# Altium PCB HDMI_To_MIPI.PcbDoc
Units mm, origin at the board's own origin, x right, y up, seen from the top; angles counter-clockwise.
Board outline 30 x 30 mm, 2 copper layers (Top Layer, Bottom Layer); 2 components, 11 nets, 42 pads, 23 vias.
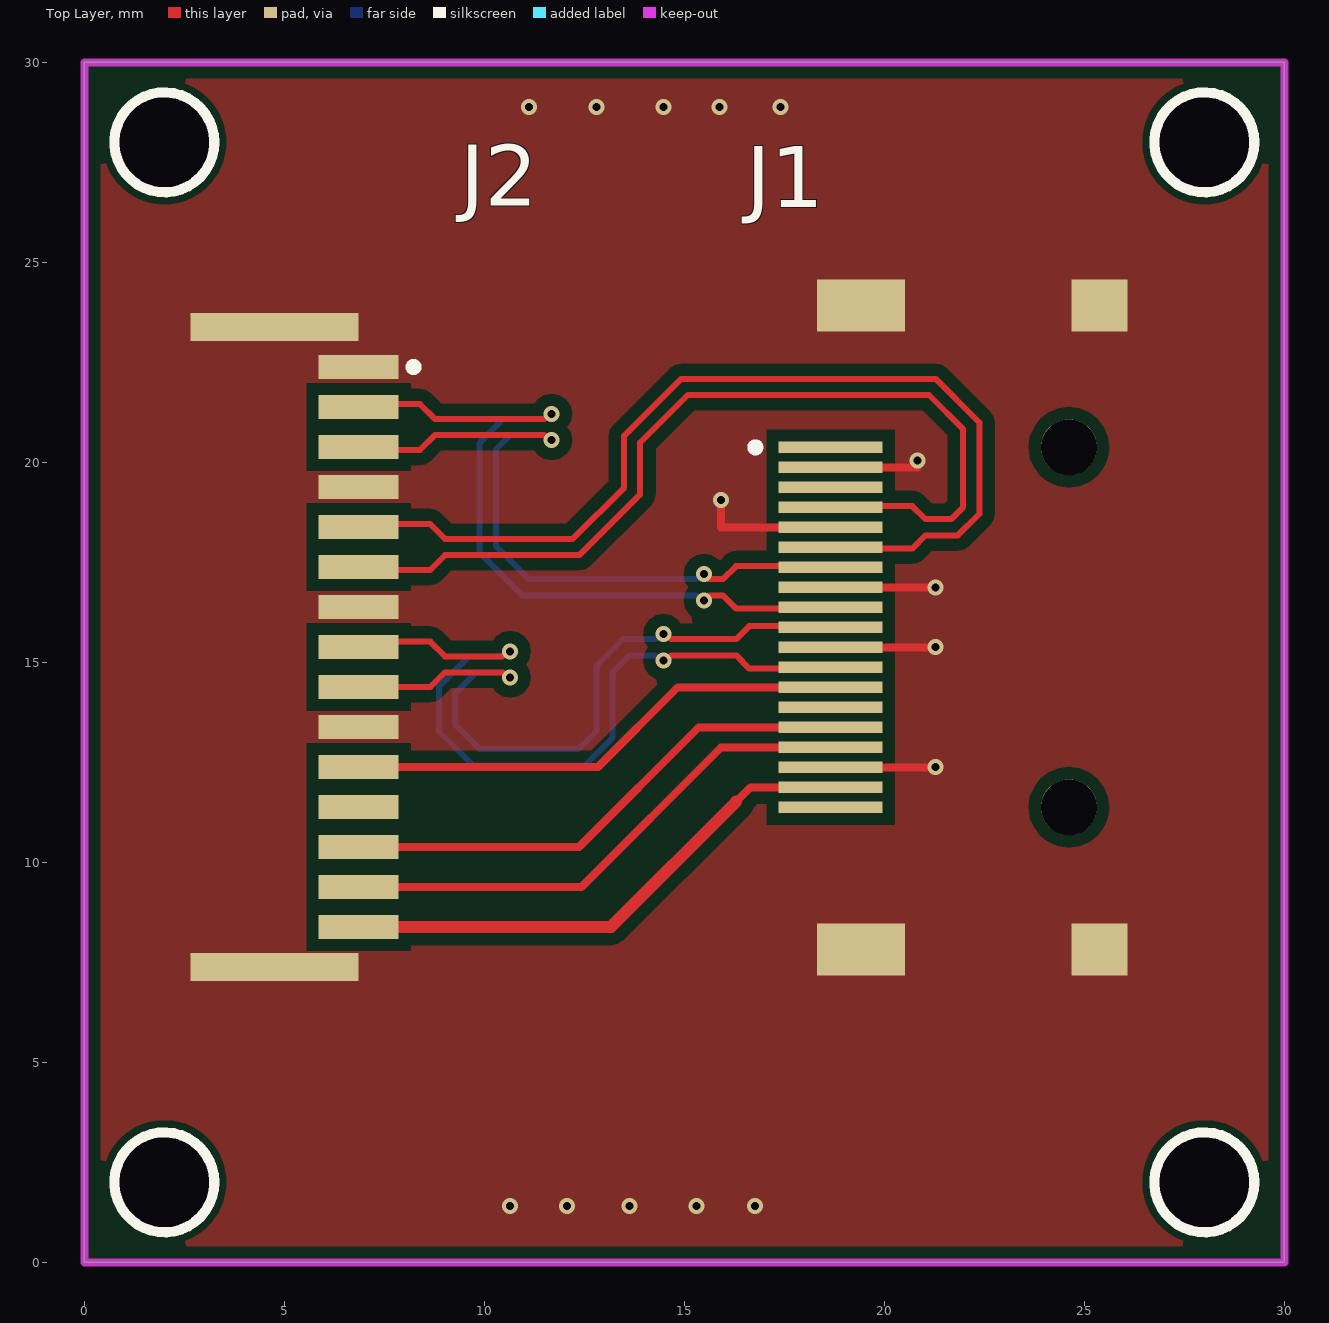
[diagram p0: Top Layer view]
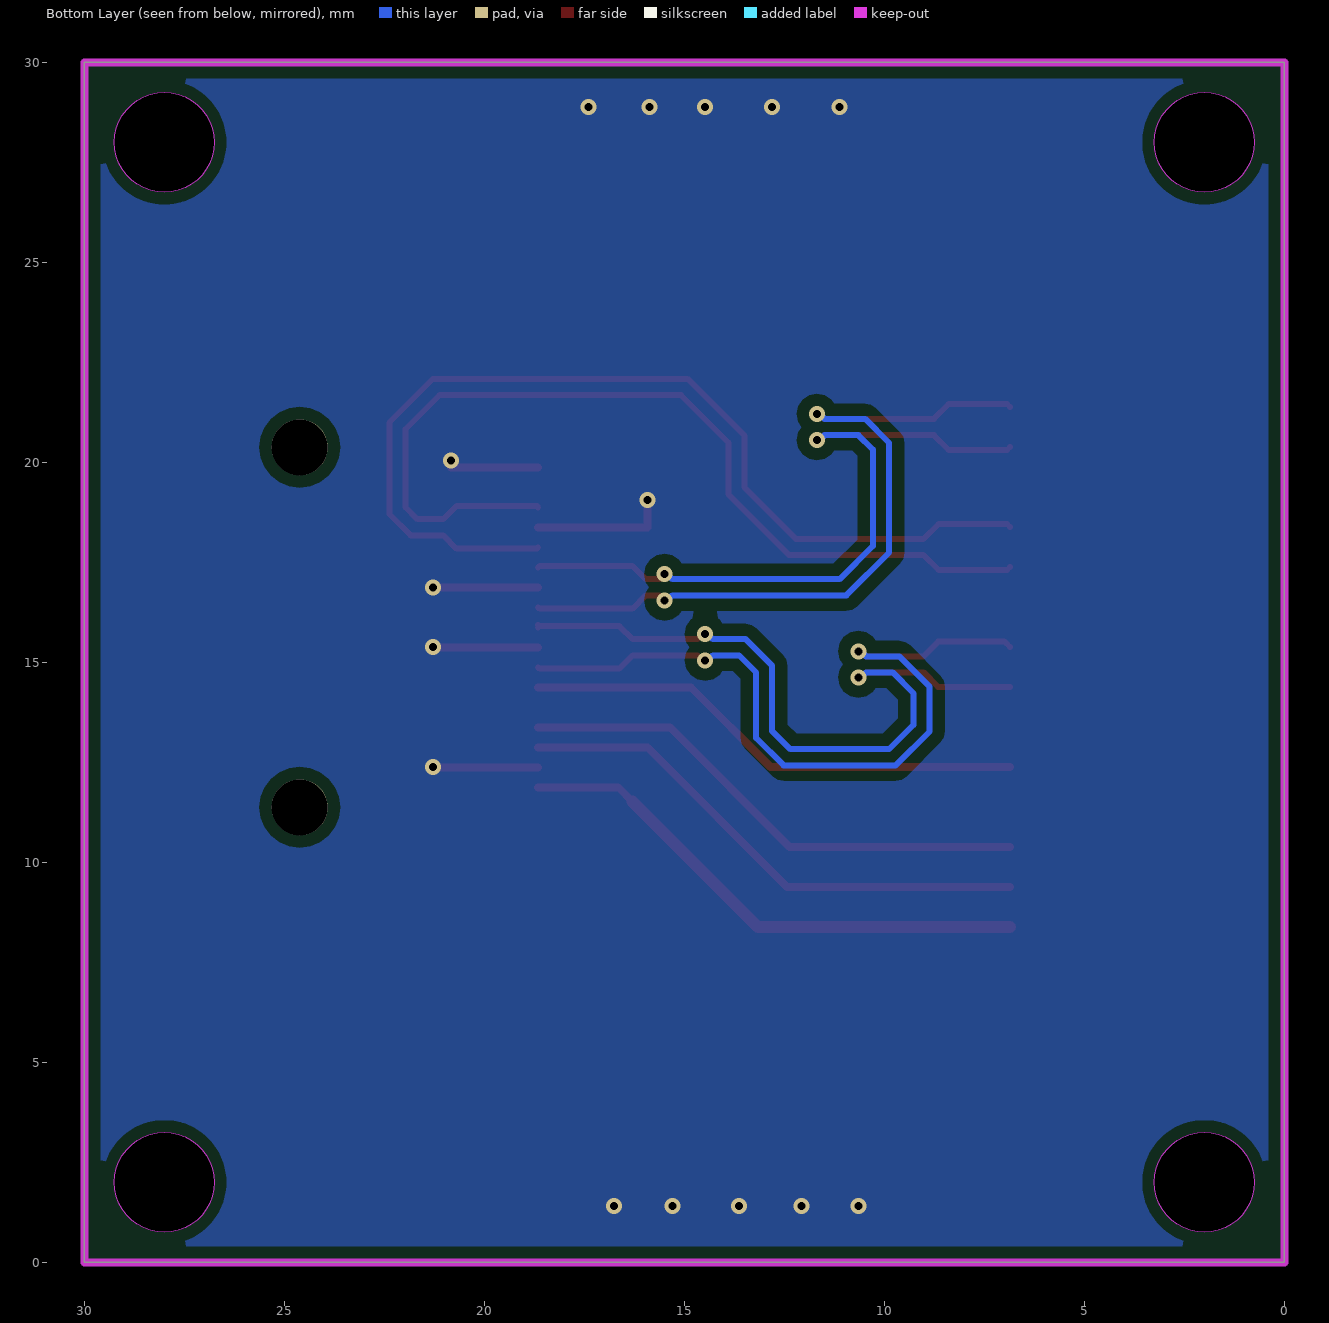
[diagram p1: Bottom Layer view, seen from below]

## Layer stack, top to bottom
Top Solder: solder mask 0.0102, Solder Resist, Dk 3.5
Top Layer: signal copper 0.0356
Dielectric 1: dielectric 0.32, FR-4, Dk 4.8
Bottom Layer: signal copper 0.0356
Bottom Solder: solder mask 0.0102, Solder Resist, Dk 3.5

## Board outline
0,0 30,0 30,30 0,30
cut-out: 26.75,2 ccw(c28,2) 28,0.75 ccw(c28,2) 29.25,2 ccw(c28,2) 28,3.25 ccw(c28,2)
cut-out: 0.75,2 ccw(c2,2) 2,0.75 ccw(c2,2) 3.25,2 ccw(c2,2) 2,3.25 ccw(c2,2)
cut-out: 26.75,28 ccw(c28,28) 28,26.75 ccw(c28,28) 29.25,28 ccw(c28,28) 28,29.25 ccw(c28,28)
cut-out: 0.75,28 ccw(c2,28) 2,26.75 ccw(c2,28) 3.25,28 ccw(c2,28) 2,29.25 ccw(c2,28)

## Design rules (kind name [scope] priority, off if disabled: settings)
Clearance Clearance_1 [InPoly] p1: gap=0.3 ignorepadtopadclearanceinfootprint=FALSE
Clearance [All] p2: gap=0.254 ignorepadtopadclearanceinfootprint=TRUE
DiffPairsRouting [All] p1: maxlimit=5 minlimit=0.254 mostfreqgap=1 toplayer_minwidth=0.15 toplayer_maxwidth=0.381 toplayer_prefwidth=0.381 bottomlayer_minwidth=0.15 bottomlayer_maxwidth=0.381 bottomlayer_prefwidth=0.381 substack1={B5EAA202-C5EF-4AA6-949E-0529C2F063FD} toplayer_{b5eaa202-c5ef-4aa6-949e-0529c2f063fd}_minwidth=0.15 toplayer_{b5eaa202-c5ef-4aa6-949e-0529c2f063fd}_maxwidth=0.381 toplayer_{b5eaa202-c5ef-4aa6-949e-0529c2f063fd}_prefwidth=0.381 bottomlayer_{b5eaa202-c5ef-4aa6-949e-0529c2f063fd}_minwidth=0.15 bottomlayer_{b5eaa202-c5ef-4aa6-949e-0529c2f063fd}_maxwidth=0.381 bottomlayer_{b5eaa202-c5ef-4aa6-949e-0529c2f063fd}_prefwidth=0.381 maxuncoupledlength=12.7
HoleSize [All] p1: absolutevalues=TRUE maxlimit=10 minlimit=0.025 maxpercent=80.000 minpercent=20.000
PolygonConnect [All] p1: connectstyle=Direct reliefconductorwidth=0.254 reliefentries=4 polygonreliefangle="90 Angle" airgapwidth=0.254
RoutingVias [All] p1: holewidth=0.2 width=0.4 viastyle="Through Hole" minholewidth=0.2 minwidth=0.4 maxholewidth=5 maxwidth=1.27
SolderMaskExpansion [All] p1: expansion=0.102
Width [All] p1: maxlimit=3 minlimit=0.15 preferedwidth=0.254 substack1={B5EAA202-C5EF-4AA6-949E-0529C2F063FD}
28 further rules are at their usual default settings.

## Classes and differential pairs
differential pair HDMI_MIPI_D1: +HDMI_MIPI_D1_P -HDMI_MIPI_D1_N
differential pair HDMI_MIPI_D0: +HDMI_MIPI_D0_P -HDMI_MIPI_D0_N
differential pair HDMI_MIPI_CLK: +HDMI_MIPI_CLK_P -HDMI_MIPI_CLK_N

## Components (designator, comment, footprint, x,y, rotation, side; value= is the part's Value field where it differs from the comment)
J1 "HDMI" 2000124100BK 23.876,15.875 r90 top
J2 "SFW 15R-1STE1LF" AMPHENOL_SFW15R-1STE1LF 6.858,15.383 r270 top

## Footprints (in the part's own frame and the unit in brackets; to place one, negate y for a bottom-side part, rotate by r counter-clockwise, add the part's x,y. Pads: shape width x height; smd on the part's side, far side on the other; paste and mask are expansions set on the pad)
2000124100BK [mm]
  rect 0.28x2.6 smd: 1(4.5,5.22) 2(4,5.22) 3(3.5,5.22) 4(3,5.22) 5(2.5,5.22) 6(2,5.22) 7(1.5,5.22) 8(1,5.22) 9(0.5,5.22) 10(0,5.22) 11(-0.5,5.22) 12(-1,5.22) 13(-1.5,5.22) 14(-2,5.22) 15(-2.5,5.22) 16(-3,5.22) 17(-3.5,5.22) 18(-4,5.22) 19(-4.5,5.22)
  rect 1.3x2.2 smd: 20(-8.05,4.46) 23(8.05,4.46)
  rect 1.3x1.4 smd: 21(-8.05,-1.5) 22(8.05,-1.5)
  round 1.4 hole 1.4 unplated: MH1(-4.5,-0.74) MH2(4.5,-0.74)
  silkscreen extent 4.4,7 4.6,7.2, body extent -8.61,-6.05 8.61,6.15, height 6.22
AMPHENOL_SFW15R-1STE1LF [mm]
  rect 0.6x2 smd: 1(-7,0) 2(-6,0) 3(-5,0) 4(-4,0) 5(-3,0) 6(-2,0) 7(-1,0) 8(0,0) 9(1,0) 10(2,0) 11(3,0) 12(4,0) 13(5,0) 14(6,0) 15(7,0)
  rect 0.7x4.2 smd: S1(-8,-2.1) S2(8,-2.1)
  silkscreen extent -7.1,1.27 -6.9,1.47, body extent -10.4,-6 10.4,0.5, height 2.71

## Part data
J1: library part HDMI-normal, Manufacturer_Name="CNC Tech", Manufacturer_Part_Number=2000-1-2-41-00-BK, Package=2000124100BK, Arrow_Part_Number=2000-1-2-41-00-BK, Arrow_Price-Stock=https://www.arrow.com/en/products/2000-1-2-41-00-bk/cnc-tech-llc, DeviceSetName=2000-1-2-41-00-BK, GateName_1=G$1, Height=6mm, LibraryName=2000-1-2-41-00-BK, SymbolName_1=2000-1-2-41-00-BK
J2: library part HEADER15, Package=AMPHENOL_SFW15R-1STE1LF, DeviceSetName=SFW15R-1STE1LF, Digi-Key_Part_Number=609-1905-1-ND, DigiKey-Purchase-URL=https://snapeda.com/shop?store=DigiKey&id=2097159, GateName_1=G$1, LibraryName=SFW15R-1STE1LF, MF="Amphenol ICC", Mouser-Purchase-URL=https://snapeda.com/shop?store=Mouser&id=2097159, MP=SFW15R-1STE1LF, SymbolName_1=SFW15R-1STE1LF

## Via types
v1: diameter 0.4, hole 0.2, Top Layer to Bottom Layer, tented both sides, 23 vias

## Nets (pads, with @x,y where several pads share a name; then routed paths per layer and width w, separated by ;. In a path a pad name is that pad's centre, name@x,y a point inside that pad or via, vN(x,y) a via of type N, cw(c..) or ccw(c..) an arc to the next point about the centre after c; other vN are vias at no path point)
3V3: J1.18 J2.15 | length 13.2
  Top Layer w0.2: 16.294,11.515 16.654,11.875 J1.18
  Top Layer w0.3: J2.15 13.162,8.383 16.294,11.515
ENABLE: J1.13 J2.11 | length 12.6
  Top Layer w0.2: J2.11 12.846,12.383 14.838,14.375 J1.13
GND: J1.2 J1.5 J1.8 J1.11 J1.17 J1.20 J1.21 J1.22 J1.23 J2.1 J2.4 J2.7 J2.10 J2.S1 J2.S2 | length 13.7
  Top Layer w0.2: v1(15.923,19.055) 15.923,18.375 J1.5 ; J1.17 21.284,12.375 v1(21.284,12.384) ; J1.11 21.284,15.375 v1(21.284,15.383) ; J1.8 v1(21.284,16.875) ; J1.2 20.828,19.875 v1(20.828,20.046)
  other v1: 10.648,1.408 12.065,1.408 13.634,1.408 15.301,1.408 16.764,1.408 11.117,28.884 12.804,28.884 14.478,28.884 15.875,28.884 17.399,28.884
HDMI_MIPI_CLK_N: J1.12 J2.8 | length 19.8
  Top Layer w0.15: J2.8 6.99,15.515 8.653,15.515 9.017,15.151 10.455,15.151 10.58,15.276 v1(10.648,15.276) ; v1(14.478,15.048) 14.546,15.048 14.671,15.173 16.294,15.173 16.623,14.844 18.625,14.844 J1.12
  Bottom Layer w0.15: v1(10.648,15.276) 10.58,15.276 10.455,15.151 9.627,15.151 8.867,14.391 8.867,13.272 9.716,12.423 11.47,12.423 12.518,12.423 13.208,13.113 13.208,14.747 13.634,15.173 14.285,15.173 14.41,15.048 v1(14.478,15.048)
HDMI_MIPI_CLK_P: J1.10 J2.9 | length 18.4
  Top Layer w0.15: J2.9 8.653,14.383 9.017,14.747 10.455,14.747 10.58,14.622 v1(10.648,14.622) ; v1(14.478,15.702) 14.546,15.702 14.671,15.577 16.294,15.577 16.623,15.906 18.625,15.906 J1.10 ; J1.10@18.634,15.906 J1.10@18.656,15.928
  Bottom Layer w0.15: v1(10.648,14.622) 10.58,14.622 10.455,14.747 9.794,14.747 9.271,14.224 9.271,13.439 9.883,12.827 12.351,12.827 12.804,13.28 12.804,14.914 13.467,15.577 14.285,15.577 14.41,15.702 v1(14.478,15.702)
HDMI_MIPI_D0_N: J1.9 J2.2 | length 19.4
  Top Layer w0.15: J2.2 6.933,21.458 8.39,21.458 8.763,21.085 11.491,21.085 11.616,21.21 v1(11.684,21.21) ; v1(15.494,16.548) 15.619,16.673 15.965,16.673 16.294,16.344 18.625,16.344 J1.9
  Bottom Layer w0.15: v1(11.684,21.21) 11.616,21.21 11.491,21.085 10.481,21.085 9.883,20.487 9.883,17.74 10.95,16.673 15.301,16.673 15.426,16.548 v1(15.494,16.548)
HDMI_MIPI_D0_P: J1.7 J2.3 | length 18
  Top Layer w0.15: J2.3 6.933,20.308 8.39,20.308 8.763,20.681 11.491,20.681 11.616,20.556 v1(11.684,20.556) ; v1(15.494,17.202) 15.619,17.077 15.965,17.077 16.294,17.406 18.625,17.406 J1.7
  Bottom Layer w0.15: v1(11.684,20.556) 11.616,20.556 11.491,20.681 10.648,20.681 10.287,20.32 10.287,17.907 11.117,17.077 15.301,17.077 15.426,17.202 v1(15.494,17.202)
HDMI_MIPI_D1_N: J1.6 J2.5 | length 24.9
  Top Layer w0.15: J2.5 6.933,18.458 8.644,18.458 9.017,18.085 12.21,18.085 13.494,19.369 13.494,20.662 14.918,22.087 21.284,22.087 22.375,20.996 22.375,18.708 21.84,18.173 21.029,18.173 20.7,17.844 18.687,17.844 J1.6
HDMI_MIPI_D1_P: J1.4 J2.6 | length 23.6
  Top Layer w0.15: J2.6 6.933,17.308 8.644,17.308 9.017,17.681 12.377,17.681 13.898,19.201 13.898,20.495 15.086,21.683 21.117,21.683 21.971,20.829 21.971,18.875 21.673,18.577 21.029,18.577 20.7,18.906 18.687,18.906 J1.4
SCL: J1.15 J2.13 | length 13
  Top Layer w0.2: J2.13 12.368,10.383 15.36,13.375 J1.15
SDA: J1.16 J2.14 | length 13.2
  Top Layer w0.2: J2.14 12.431,9.383 15.923,12.875 J1.16
pads on no net: J1.1 J1.3 J1.14 J1.19 J1.MH1 J1.MH2 J2.12

## Polygon pours and split planes (outlines as drawn)
GND on Bottom Layer "GND_L02_P000" (solid, remove dead copper, pour order 0): 0,0 0,30 30,30 30,0
GND on Top Layer "GND_L01_P002" (solid, remove dead copper, pour order 2): 0,0 0,30 30,30 30,0
no net on Layer0 "Default Coverlay 2 Top" (split plane): 0,0 30,0 30,30 0,30
no net on Layer0 "Default Coverlay 2 Bottom" (split plane): 0,0 30,0 30,30 0,30

## Keep-outs
Keep-Out Layer:
  the board outline again, w0.2

## Silkscreen, mask and mechanical layers (free items; w line width, h text height)
Top Overlay:
  circle w0.254: c28,28 r1.25
  circle w0.254: c28,2 r1.25
  circle w0.254: c2,2 r1.25
  circle w0.254: c2,28 r1.25